# EAGLE board rekick011-panelized (EAGLE 4.16), part 1 of 2
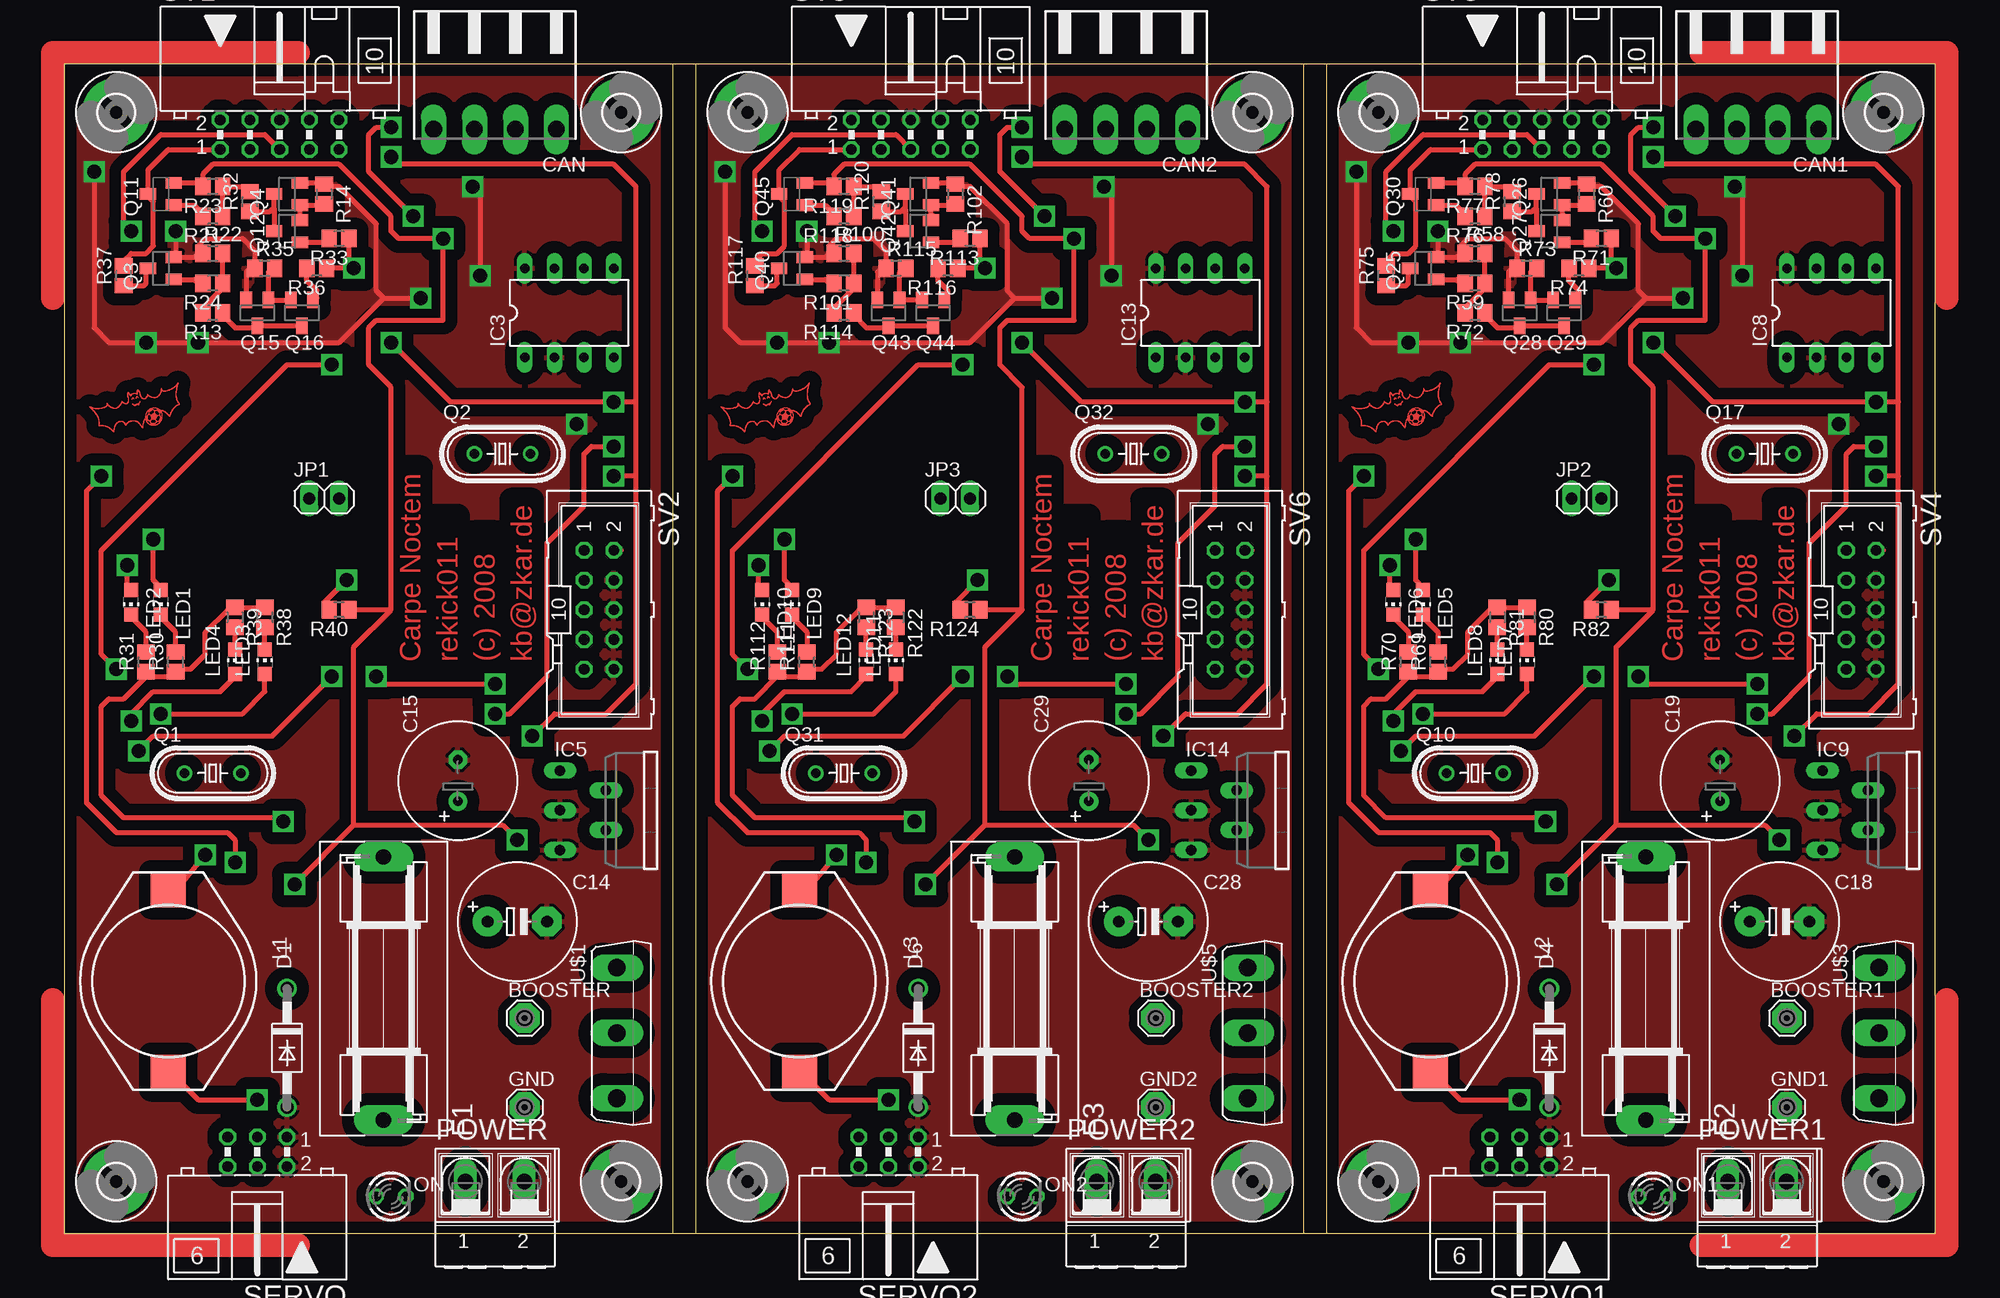
[diagram p0: board, top side]
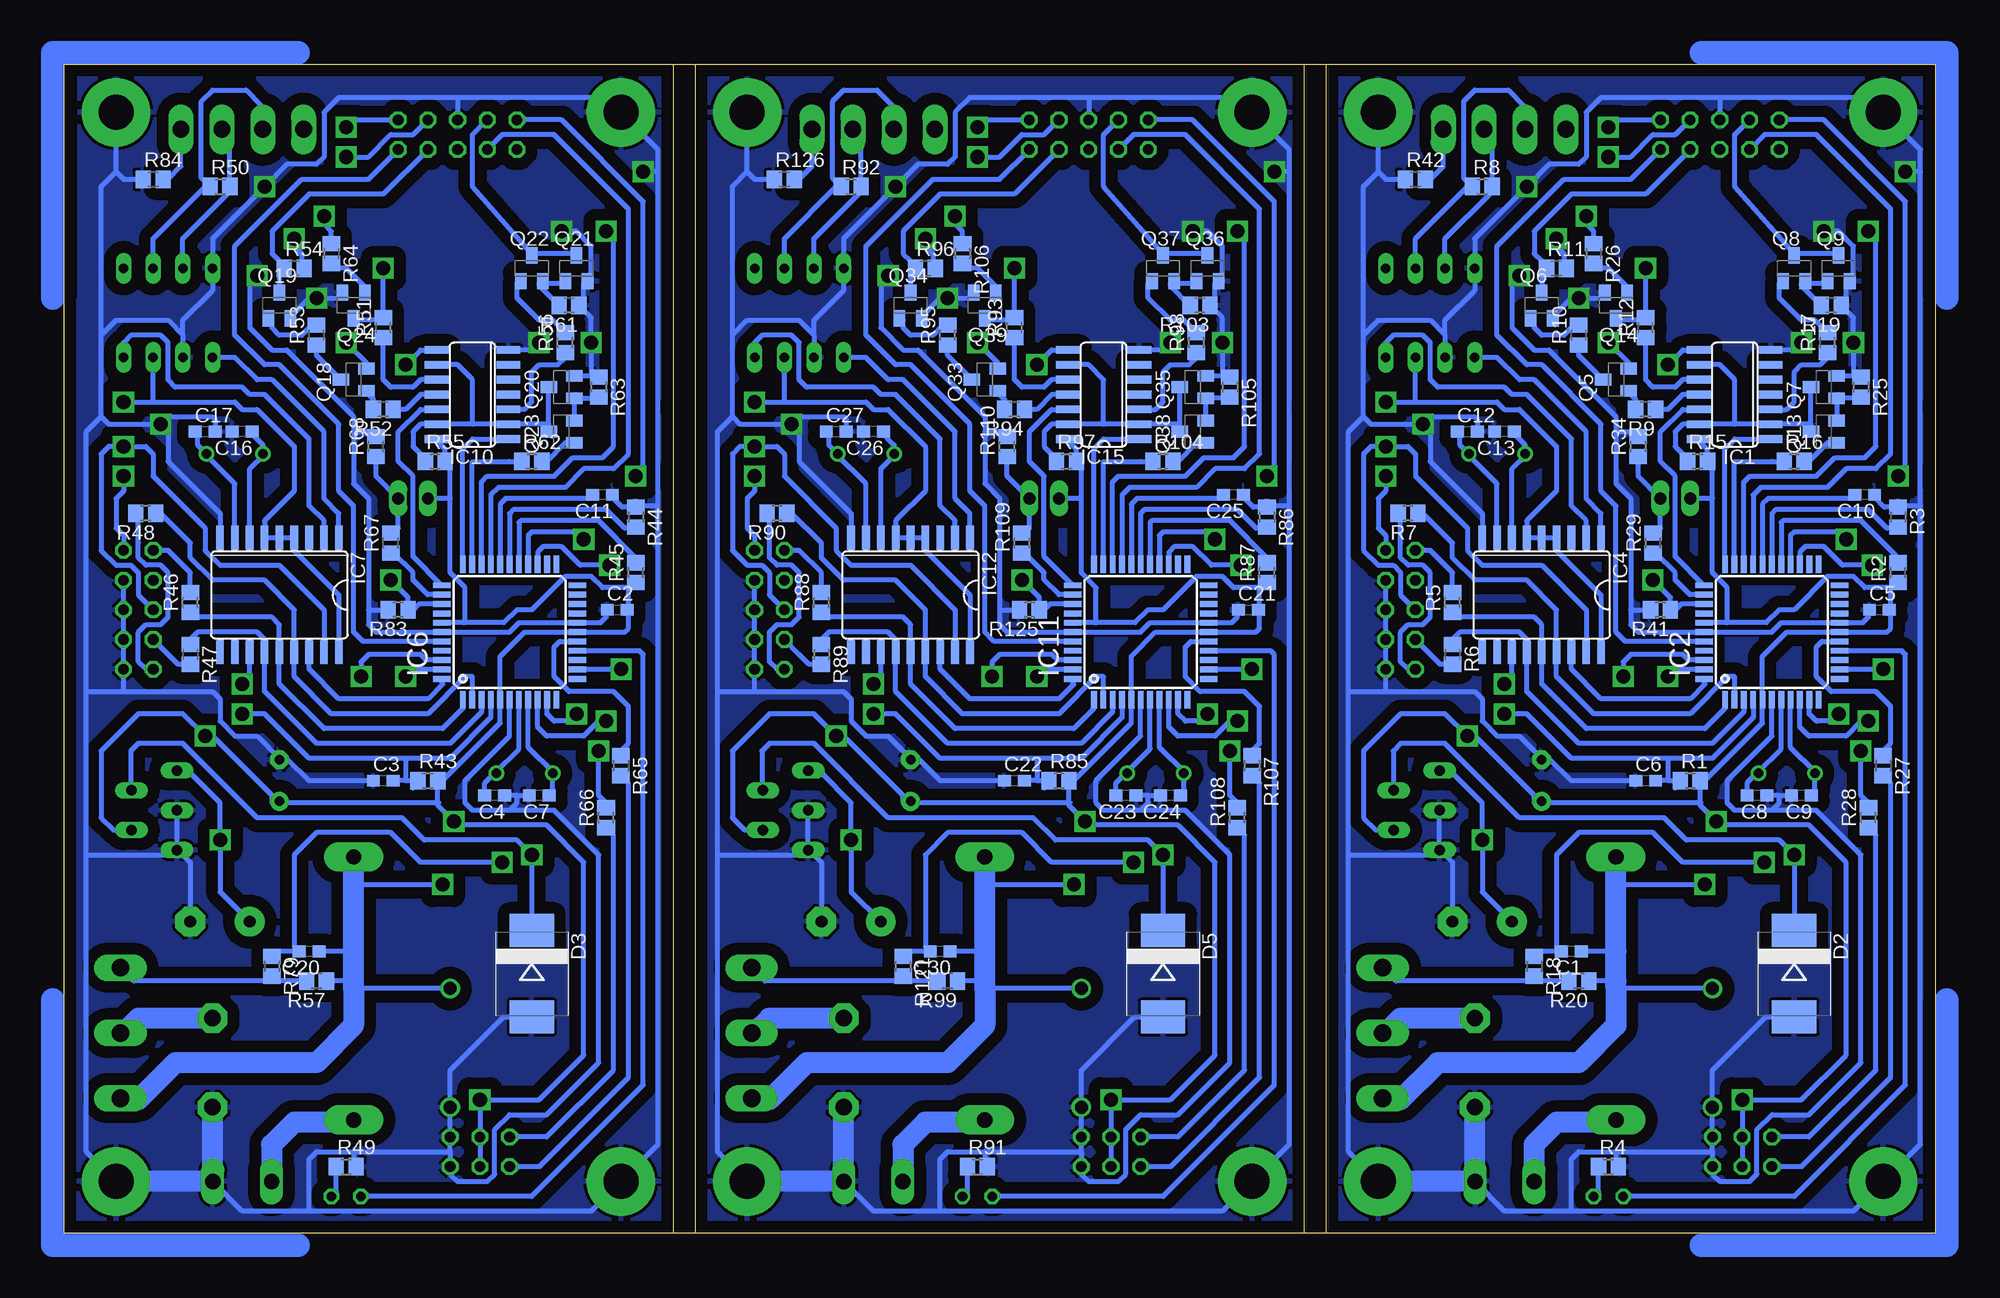
[diagram p1: board, bottom side, seen from below]

Size 160 x 100 mm. Coordinates in mm from the lower left corner, seen from the top.
Outline: 0,0 160,0
Outline: 160,0 160,100
Outline: 160,100 0,100
Outline: 0,100 0,0
Outline: 0,0 52.05,0 52.05,100 0,100
Outline: 0,100 0,0
Outline: 160,0 107.95,0 107.95,100 160,100
Outline: 160,0 160,100
Outline: 53.98,0 106.03,0 106.03,100 53.98,100 53.98,0
Copper layers (1*16): Top 0.035mm / dielectric 1.5mm / Bottom 0.035mm
Design rules "default": minimum track width 10mil, minimum drill 24mil, track to track 8mil, track to pad 8mil, pad to pad 8mil, via to via 8mil, smd to smd 8mil, copper to edge 40mil, drill to drill 8mil, minimum pad ring 10mil, minimum via ring 8mil, stop-mask expansion 4mil, vias tented up to drill 0mil, thermal gap 10mil
Net classes: 1 Power: width 0.406 mm

## Footprints (pad centres in the part's own frame; a part is rotated, then mirrored left to right if it is on the bottom)
SE14 = drill 1.397 pad 2.54 octagon: MP 0,0
C0603 = smd 1.1 x 1: 1 -0.85,0; 2 0.85,0
E5-10,5 = drill 1.016 pad 2.54 round: + -2.54,0 | drill 1.016 pad 2.54 octagon: - 2.54,0
E3,5-10 = drill 0.813 pad 1.6 round: + -1.778,0 | drill 0.813 pad 1.6 octagon: - 1.778,0
90-4 = drill 1.422 long: 1 -5.25,5.25; 2 -1.75,5.25; 3 1.75,5.25; 4 5.25,5.25
DO41-10 = drill 1.118 round: A 5.08,0; C -5.08,0
SMC = smd 2.8 x 3.8: A 3.7,0; C -3.7,0
SH22,5A = drill 1.321 pad 2.54 long: 1 -11.252,0; 2 11.252,0
3,0-PAD = drill 3 pad 5.842 round: B3,0 0,0
SO14 = smd 0.66 x 2.032: 1 -3.81,-3.073; 2 -2.54,-3.073; 3 -1.27,-3.073; 4 0,-3.073; 5 1.27,-3.073; 6 2.54,-3.073; 7 3.81,-3.073; 8 3.81,3.073; 9 2.54,3.073; 10 1.27,3.073; 11 0,3.073; 12 -1.27,3.073; 13 -2.54,3.073; 14 -3.81,3.073
TQFP44 = smd 1.5 x 0.5: 1 -5.8,4; 2 -5.8,3.2; 3 -5.8,2.4; 4 -5.8,1.6; 5 -5.8,0.8; 6 -5.8,0; 7 -5.8,-0.8; 8 -5.8,-1.6; 9 -5.8,-2.4; 10 -5.8,-3.2; 11 -5.8,-4; 23 5.8,-4; 24 5.8,-3.2; 25 5.8,-2.4; 26 5.8,-1.6; 27 5.8,-0.8; 28 5.8,0; 29 5.8,0.8; 30 5.8,1.6; 31 5.8,2.4; 32 5.8,3.2; 33 5.8,4 | smd 0.5 x 1.5: 12 -4,-5.8; 13 -3.2,-5.8; 14 -2.4,-5.8; 15 -1.6,-5.8; 16 -0.8,-5.8; 17 0,-5.8; 18 0.8,-5.8; 19 1.6,-5.8; 20 2.4,-5.8; 21 3.2,-5.8; 22 4,-5.8; 34 4,5.8; 35 3.2,5.8; 36 2.4,5.8; 37 1.6,5.8; 38 0.8,5.8; 39 0,5.8; 40 -0.8,5.8; 41 -1.6,5.8; 42 -2.4,5.8; 43 -3.2,5.8; 44 -4,5.8
DIL08 = drill 0.813 long: 1 -3.81,-3.81; 2 -1.27,-3.81; 3 1.27,-3.81; 4 3.81,-3.81; 5 3.81,3.81; 6 1.27,3.81; 7 -1.27,3.81; 8 -3.81,3.81
SO18L = smd 0.66 x 2.032: 1 -5.08,-4.902; 2 -3.81,-4.902; 3 -2.54,-4.902; 4 -1.27,-4.902; 5 0,-4.902; 6 1.27,-4.902; 7 2.54,-4.902; 8 3.81,-4.902; 9 5.08,-4.902; 10 5.08,4.902; 11 3.81,4.902; 12 2.54,4.902; 13 1.27,4.902; 14 0,4.902; 15 -1.27,4.902; 16 -2.54,4.902; 17 -3.81,4.902; 18 -5.08,4.902
TO220-51 = drill 0.9 long: 1 -3.4,-8.4; 2 -1.7,-4.5; 3 0,-8.4; 4 1.7,-4.5; 5 3.4,-8.4
1X02 = drill 1.016 long: 1 -1.27,0; 2 1.27,0
PISR = smd 3 x 3: P$1 -7.8,0; P$2 7.8,0
CHIP-LED0805 = smd 1.2 x 1.2: A 0,-1.05; C 0,1.05
LED3MM = drill 0.813 octagon: A -1.27,0; K 1.27,0
AK500/2-H = drill 1.321 long: 1 -2.515,0; 2 2.515,0
HC49/S = drill 0.813 round: 1 -2.413,0; 2 2.413,0
HC49U-V = drill 0.813 round: 1 -2.413,0; 2 2.413,0
SOT23 = smd 1 x 1.4: 1 -0.95,-1.1; 2 0.95,-1.1; 3 0,1.1
SOT23-BEC = smd 1 x 1.4: B -0.95,-1.1; C 0,1.1; E 0.95,-1.1
R0805 = smd 1.3 x 1.5: 1 -0.85,0; 2 0.85,0
ML6L = drill 0.914 octagon: 1 -2.54,-1.27; 2 -2.54,1.27; 3 0,-1.27; 4 0,1.27; 5 2.54,-1.27; 6 2.54,1.27
ML10L = drill 0.914 octagon: 1 -5.08,-1.27; 2 -5.08,1.27; 3 -2.54,-1.27; 4 -2.54,1.27; 5 0,-1.27; 6 0,1.27; 7 2.54,-1.27; 8 2.54,1.27; 9 5.08,-1.27; 10 5.08,1.27
ML10 = drill 0.914 octagon: 1 -5.08,-1.27; 2 -5.08,1.27; 3 -2.54,-1.27; 4 -2.54,1.27; 5 0,-1.27; 6 0,1.27; 7 2.54,-1.27; 8 2.54,1.27; 9 5.08,-1.27; 10 5.08,1.27
TO247BV = drill 1.499 long: D 0,-0.381; G -5.588,-0.381; S 5.588,-0.381

## Placement (x,y rotation side)
BOOSTER  SE14  [SE14]  39.37,18.41 0 top
BOOSTER1  SE14  [SE14]  147.32,18.41 0 top
BOOSTER2  SE14  [SE14]  93.34,18.41 0 top
C1  100n  [C0603]  31.11,24.13 180 bottom
C2  100n  [C0603]  112.71,53.34 0 bottom
C3  100n  [C0603]  132.72,38.73 0 bottom
C4  22p  [C0603]  123.19,37.47 180 bottom
C5  100n  [C0603]  4.76,53.34 0 bottom
C6  100n  [C0603]  24.77,38.73 0 bottom
C7  22p  [C0603]  119.38,37.47 180 bottom
C8  22p  [C0603]  15.24,37.47 180 bottom
C9  22p  [C0603]  11.43,37.47 180 bottom
C10  100n  [C0603]  6.03,63.18 180 bottom
C11  100n  [C0603]  113.98,63.18 180 bottom
C12  22p  [C0603]  40.01,68.58 0 bottom
C13  22p  [C0603]  36.83,68.58 180 bottom
C14  220µF/35V  [E5-10,5]  38.73,26.67 0 top
C15  220µF/25V  [E3,5-10]  33.66,38.73 90 top
C16  22p  [C0603]  144.78,68.58 180 bottom
C17  22p  [C0603]  147.96,68.58 0 bottom
C18  220µF/35V  [E5-10,5]  146.69,26.67 0 top
C19  220µF/25V  [E3,5-10]  141.6,38.73 90 top
C20  100n  [C0603]  139.06,24.13 180 bottom
C21  100n  [C0603]  58.74,53.34 0 bottom
C22  100n  [C0603]  78.74,38.73 0 bottom
C23  22p  [C0603]  69.22,37.47 180 bottom
C24  22p  [C0603]  65.41,37.47 180 bottom
C25  100n  [C0603]  60.01,63.18 180 bottom
C26  22p  [C0603]  90.81,68.58 180 bottom
C27  22p  [C0603]  93.98,68.58 0 bottom
C28  220µF/35V  [E5-10,5]  92.71,26.67 0 top
C29  220µF/25V  [E3,5-10]  87.63,38.73 90 top
C30  100n  [C0603]  85.09,24.13 180 bottom
CAN  [90-4]  36.83,99.69 180 top
CAN1  [90-4]  144.78,99.69 180 top
CAN2  [90-4]  90.81,99.69 180 top
D1  1N4001  [DO41-10]  19.05,15.88 270 top
D2  MBRS360  [SMC]  12.06,22.23 270 bottom
D3  MBRS360  [SMC]  120.02,22.23 270 bottom
D4  1N4001  [DO41-10]  127,15.88 270 top
D5  MBRS360  [SMC]  66.04,22.23 270 bottom
D6  1N4001  [DO41-10]  73.03,15.88 270 top
F1  [SH22,5A]  27.3,20.95 90 top
F2  [SH22,5A]  135.25,20.95 90 top
F3  [SH22,5A]  81.28,20.95 90 top
GND  SE14  [SE14]  39.37,10.79 0 top
GND1  SE14  [SE14]  147.32,10.79 0 top
GND2  SE14  [SE14]  93.34,10.79 0 top
H1  MOUNT-PAD-ROUND3.0  [3,0-PAD]  4.45,95.89 0 top
H2  MOUNT-PAD-ROUND3.0  [3,0-PAD]  4.45,4.45 0 top
H3  MOUNT-PAD-ROUND3.0  [3,0-PAD]  47.62,95.89 0 top
H4  MOUNT-PAD-ROUND3.0  [3,0-PAD]  47.62,4.45 0 top
H5  MOUNT-PAD-ROUND3.0  [3,0-PAD]  112.39,95.89 0 top
H6  MOUNT-PAD-ROUND3.0  [3,0-PAD]  112.39,4.45 0 top
H7  MOUNT-PAD-ROUND3.0  [3,0-PAD]  155.57,95.89 0 top
H8  MOUNT-PAD-ROUND3.0  [3,0-PAD]  155.57,4.45 0 top
H9  MOUNT-PAD-ROUND3.0  [3,0-PAD]  58.42,95.89 0 top
H10  MOUNT-PAD-ROUND3.0  [3,0-PAD]  58.42,4.45 0 top
H11  MOUNT-PAD-ROUND3.0  [3,0-PAD]  101.6,95.89 0 top
H12  MOUNT-PAD-ROUND3.0  [3,0-PAD]  101.6,4.45 0 top
IC1  4081D  [SO14]  17.14,71.75 90 bottom
IC2  MEGA32-A  [TQFP44]  13.97,51.44 90 bottom
IC3  PCA82C250  [DIL08]  43.18,78.74 0 top
IC4  MCP2515-E/SO  [SO18L]  33.66,54.61 180 bottom
IC5  LM2576-5V  [TO220-51]  50.8,36.2 270 top
IC6  MEGA32-A  [TQFP44]  121.92,51.44 90 bottom
IC7  MCP2515-E/SO  [SO18L]  141.6,54.61 180 bottom
IC8  PCA82C250  [DIL08]  151.13,78.74 0 top
IC9  LM2576-5V  [TO220-51]  158.75,36.2 270 top
IC10  4081D  [SO14]  125.09,71.75 90 bottom
IC11  MEGA32-A  [TQFP44]  67.94,51.44 90 bottom
IC12  MCP2515-E/SO  [SO18L]  87.63,54.61 180 bottom
IC13  PCA82C250  [DIL08]  97.16,78.74 0 top
IC14  LM2576-5V  [TO220-51]  104.78,36.2 270 top
IC15  4081D  [SO14]  71.12,71.75 90 bottom
JP1  [1X02]  22.23,62.87 0 top
JP2  [1X02]  130.18,62.87 0 top
JP3  [1X02]  76.2,62.87 0 top
L1  [PISR]  8.89,21.59 270 top
L2  [PISR]  116.84,21.59 270 top
L3  [PISR]  62.87,21.59 270 top
LED1  [CHIP-LED0805]  8.26,53.98 180 top
LED2  [CHIP-LED0805]  5.71,53.98 180 top
LED3  [CHIP-LED0805]  17.14,48.9 0 top
LED4  [CHIP-LED0805]  14.61,48.9 0 top
LED5  [CHIP-LED0805]  116.2,53.98 180 top
LED6  [CHIP-LED0805]  113.67,53.98 180 top
LED7  [CHIP-LED0805]  125.09,48.9 0 top
LED8  [CHIP-LED0805]  122.56,48.9 0 top
LED9  [CHIP-LED0805]  62.23,53.98 180 top
LED10  [CHIP-LED0805]  59.69,53.98 180 top
LED11  [CHIP-LED0805]  71.12,48.9 0 top
LED12  [CHIP-LED0805]  68.58,48.9 0 top
ON  green  [LED3MM]  27.94,3.17 0 top
ON1  green  [LED3MM]  135.89,3.17 0 top
ON2  green  [LED3MM]  81.92,3.17 0 top
POWER  [AK500/2-H]  36.83,4.45 0 top
POWER1  [AK500/2-H]  144.78,4.45 0 top
POWER2  [AK500/2-H]  90.81,4.45 0 top
Q1  16MHz  [HC49/S]  12.7,39.37 0 top
Q2  16MHz  [HC49U-V]  37.47,66.67 0 top
Q3  BC847A  [SOT23]  8.26,82.55 90 top
Q4  BC847A  [SOT23]  19.05,88.9 90 top
Q5  BC857  [SOT23-BEC]  27.3,73.03 90 bottom
Q6  BC847  [SOT23-BEC]  33.66,79.38 0 bottom
Q7  BC847  [SOT23-BEC]  9.53,72.39 90 bottom
Q8  BC847  [SOT23-BEC]  12.06,82.55 0 bottom
Q9  BC847  [SOT23-BEC]  8.26,82.55 0 bottom
Q10  16MHz  [HC49/S]  120.65,39.37 0 top
Q11  BC857A  [SOT23-BEC]  8.26,88.9 90 top
Q12  BC847A  [SOT23]  19.05,85.72 90 top
Q13  BC847  [SOT23-BEC]  9.53,68.58 90 bottom
Q14  BC847  [SOT23-BEC]  27.3,79.38 180 bottom
Q15  BC847A  [SOT23]  16.51,78.74 180 top
Q16  BC847A  [SOT23]  20.32,78.74 180 top
Q17  16MHz  [HC49U-V]  145.41,66.67 0 top
Q18  BC857  [SOT23-BEC]  135.25,73.03 90 bottom
Q19  BC847  [SOT23-BEC]  141.6,79.38 0 bottom
Q20  BC847  [SOT23-BEC]  117.47,72.39 90 bottom
Q21  BC847  [SOT23-BEC]  116.2,82.55 0 bottom
Q22  BC847  [SOT23-BEC]  120.02,82.55 0 bottom
Q23  BC847  [SOT23-BEC]  117.47,68.58 90 bottom
Q24  BC847  [SOT23-BEC]  135.25,79.38 180 bottom
Q25  BC847A  [SOT23]  116.2,82.55 90 top
Q26  BC847A  [SOT23]  127,88.9 90 top
Q27  BC847A  [SOT23]  127,85.72 90 top
Q28  BC847A  [SOT23]  124.46,78.74 180 top
Q29  BC847A  [SOT23]  128.27,78.74 180 top
Q30  BC857A  [SOT23-BEC]  116.2,88.9 90 top
Q31  16MHz  [HC49/S]  66.67,39.37 0 top
Q32  16MHz  [HC49U-V]  91.44,66.67 0 top
Q33  BC857  [SOT23-BEC]  81.28,73.03 90 bottom
Q34  BC847  [SOT23-BEC]  87.63,79.38 0 bottom
Q35  BC847  [SOT23-BEC]  63.5,72.39 90 bottom
Q36  BC847  [SOT23-BEC]  62.23,82.55 0 bottom
Q37  BC847  [SOT23-BEC]  66.04,82.55 0 bottom
Q38  BC847  [SOT23-BEC]  63.5,68.58 90 bottom
Q39  BC847  [SOT23-BEC]  81.28,79.38 180 bottom
Q40  BC847A  [SOT23]  62.23,82.55 90 top
Q41  BC847A  [SOT23]  73.03,88.9 90 top
Q42  BC847A  [SOT23]  73.03,85.72 90 top
Q43  BC847A  [SOT23]  70.48,78.74 180 top
Q44  BC847A  [SOT23]  74.3,78.74 180 top
Q45  BC857A  [SOT23-BEC]  62.23,88.9 90 top
R1  10k  [R0805]  20.95,38.73 0 bottom
R2  0  [R0805]  3.17,56.52 90 bottom
R3  0  [R0805]  3.17,61.28 270 bottom
R4  2k7  [R0805]  27.94,5.71 0 bottom
R5  4k7  [R0805]  41.27,53.98 90 bottom
R6  4k7  [R0805]  41.27,49.53 270 bottom
R7  4k7  [R0805]  45.09,61.59 180 bottom
R8  4k7  [R0805]  38.73,89.53 0 bottom
R9  1k  [R0805]  24.77,70.48 180 bottom
R10  4k7  [R0805]  30.48,76.83 90 bottom
R11  10k  [R0805]  32.38,82.55 0 bottom
R12  1k  [R0805]  24.77,77.47 90 bottom
R13  4k7  [R0805]  12.7,78.74 180 top
R14  2k2  [R0805]  22.23,88.9 270 top
R15  10k  [R0805]  20.32,66.04 0 bottom
R16  1k  [R0805]  12.06,66.04 0 bottom
R17  1k  [R0805]  9.21,76.2 90 bottom
R18  100  [R0805]  34.29,22.86 270 bottom
R19  4k7  [R0805]  8.89,79.38 180 bottom
R20  10k  [R0805]  30.48,21.59 180 bottom
R21  4k7  [R0805]  12.7,87 180 top
R22  1k  [R0805]  12.7,83.82 0 top
R23  1k  [R0805]  12.7,89.53 180 top
R24  4k7  [R0805]  12.7,81.28 180 top
R25  10M  [R0805]  6.35,72.39 270 bottom
R26  1k  [R0805]  29.21,83.82 270 bottom
R27  0  [R0805]  4.45,40.01 270 bottom
R28  0  [R0805]  5.71,35.56 90 bottom
R29  100  [R0805]  24.13,59.05 90 bottom
R30  220  [R0805]  9.53,48.9 90 top
R31  220  [R0805]  6.99,48.9 90 top
R32  4k7  [R0805]  15.88,88.27 90 top
R33  100  [R0805]  23.5,85.09 180 top
R34  10k  [R0805]  25.4,67.31 90 bottom
R35  2k2  [R0805]  17.14,82.55 0 top
R36  100  [R0805]  21.59,82.55 180 top
R37  100  [R0805]  5.08,81.92 90 top
R38  220  [R0805]  17.14,52.7 270 top
R39  220  [R0805]  14.61,52.7 270 top
R40  30k  [R0805]  23.5,53.34 180 top
R41  4k7  [R0805]  23.5,53.34 180 bottom
R42  0  [R0805]  44.45,90.17 0 bottom
R43  10k  [R0805]  128.91,38.73 0 bottom
R44  0  [R0805]  111.12,61.28 270 bottom
R45  0  [R0805]  111.12,56.52 90 bottom
R46  4k7  [R0805]  149.22,53.98 90 bottom
R47  4k7  [R0805]  149.22,49.53 270 bottom
R48  4k7  [R0805]  153.03,61.59 180 bottom
R49  2k7  [R0805]  135.89,5.71 0 bottom
R50  4k7  [R0805]  146.69,89.53 0 bottom
R51  1k  [R0805]  132.72,77.47 90 bottom
R52  1k  [R0805]  132.72,70.48 180 bottom
R53  4k7  [R0805]  138.43,76.83 90 bottom
R54  10k  [R0805]  140.34,82.55 0 bottom
R55  10k  [R0805]  128.27,66.04 0 bottom
R56  1k  [R0805]  117.16,76.2 90 bottom
R57  10k  [R0805]  138.43,21.59 180 bottom
R58  1k  [R0805]  120.65,83.82 0 top
R59  4k7  [R0805]  120.65,81.28 180 top
R60  2k2  [R0805]  130.18,88.9 270 top
R61  4k7  [R0805]  116.84,79.38 180 bottom
R62  1k  [R0805]  120.02,66.04 0 bottom
R63  10M  [R0805]  114.3,72.39 270 bottom
R64  1k  [R0805]  137.16,83.82 270 bottom
R65  0  [R0805]  112.39,40.01 270 bottom
R66  0  [R0805]  113.67,35.56 90 bottom
R67  100  [R0805]  132.08,59.05 90 bottom
R68  10k  [R0805]  133.35,67.31 90 bottom
R69  220  [R0805]  117.47,48.9 90 top
R70  220  [R0805]  114.94,48.9 90 top
R71  100  [R0805]  131.44,85.09 180 top
R72  4k7  [R0805]  120.65,78.74 180 top
R73  2k2  [R0805]  125.09,82.55 0 top
R74  100  [R0805]  129.54,82.55 180 top
R75  100  [R0805]  113.03,81.92 90 top
R76  4k7  [R0805]  120.65,87 180 top
R77  1k  [R0805]  120.65,89.53 180 top
R78  4k7  [R0805]  123.83,88.27 90 top
R79  100  [R0805]  142.24,22.86 270 bottom
R80  220  [R0805]  125.09,52.7 270 top
R81  220  [R0805]  122.56,52.7 270 top
R82  30k  [R0805]  131.44,53.34 180 top
R83  4k7  [R0805]  131.44,53.34 180 bottom
R84  0  [R0805]  152.4,90.17 0 bottom
R85  10k  [R0805]  74.93,38.73 0 bottom
R86  0  [R0805]  57.15,61.28 270 bottom
R87  0  [R0805]  57.15,56.52 90 bottom
R88  4k7  [R0805]  95.25,53.98 90 bottom
R89  4k7  [R0805]  95.25,49.53 270 bottom
R90  4k7  [R0805]  99.06,61.59 180 bottom
R91  2k7  [R0805]  81.92,5.71 0 bottom
R92  4k7  [R0805]  92.71,89.53 0 bottom
R93  1k  [R0805]  78.74,77.47 90 bottom
R94  1k  [R0805]  78.74,70.48 180 bottom
R95  4k7  [R0805]  84.45,76.83 90 bottom
R96  10k  [R0805]  86.36,82.55 0 bottom
R97  10k  [R0805]  74.3,66.04 0 bottom
R98  1k  [R0805]  63.18,76.2 90 bottom
R99  10k  [R0805]  84.45,21.59 180 bottom
R100  1k  [R0805]  66.67,83.82 0 top
R101  4k7  [R0805]  66.67,81.28 180 top
R102  2k2  [R0805]  76.2,88.9 270 top
R103  4k7  [R0805]  62.87,79.38 180 bottom
R104  1k  [R0805]  66.04,66.04 0 bottom
R105  10M  [R0805]  60.33,72.39 270 bottom
R106  1k  [R0805]  83.19,83.82 270 bottom
R107  0  [R0805]  58.42,40.01 270 bottom
R108  0  [R0805]  59.69,35.56 90 bottom
R109  100  [R0805]  78.11,59.05 90 bottom
R110  10k  [R0805]  79.38,67.31 90 bottom
R111  220  [R0805]  63.5,48.9 90 top
R112  220  [R0805]  60.96,48.9 90 top
R113  100  [R0805]  77.47,85.09 180 top
R114  4k7  [R0805]  66.67,78.74 180 top
R115  2k2  [R0805]  71.12,82.55 0 top
R116  100  [R0805]  75.56,82.55 180 top
R117  100  [R0805]  59.05,81.92 90 top
R118  4k7  [R0805]  66.67,87 180 top
R119  1k  [R0805]  66.67,89.53 180 top
R120  4k7  [R0805]  69.85,88.27 90 top
R121  100  [R0805]  88.27,22.86 270 bottom
R122  220  [R0805]  71.12,52.7 270 top
R123  220  [R0805]  68.58,52.7 270 top
R124  30k  [R0805]  77.47,53.34 180 top
R125  4k7  [R0805]  77.47,53.34 180 bottom
R126  0  [R0805]  98.42,90.17 0 bottom
SERVO  [ML6L]  16.51,6.99 180 top
SERVO1  [ML6L]  124.46,6.99 180 top
SERVO2  [ML6L]  70.48,6.99 180 top
SV1  [ML10L]  18.41,93.98 0 top
SV2  [ML10]  45.72,53.34 270 top
SV3  [ML10L]  126.36,93.98 0 top
SV4  [ML10]  153.67,53.34 270 top
SV5  [ML10L]  72.39,93.98 0 top
SV6  [ML10]  99.69,53.34 270 top
U$1  FQA12P20  [TO247BV]  47.62,17.14 270 top
U$2  [CN-LOGO-WIRE]  6.35,70.48 0 top
U$3  FQA12P20  [TO247BV]  155.57,17.14 270 top
U$4  [CN-LOGO-WIRE]  114.3,70.48 0 top
U$5  FQA12P20  [TO247BV]  101.6,17.14 270 top
U$6  [CN-LOGO-WIRE]  60.33,70.48 0 top

## Library data of the parts
BOOSTER BOOSTER1 BOOSTER2 GND GND1 GND2 = solpad
C1-C30 R1-R126 = rcl
CAN CAN1 CAN2 = con-weidmueller-sl35
D1-D6 = diode
F1-F3 = fuse
H1-H12 = holes
IC1 IC10 IC15 = 40xx
IC2 IC6 IC11 = atmel
IC3 IC8 IC13 = micro-philips
IC4 IC7 IC12 = mcp2515
IC5 IC9 IC14 = linear
JP1-JP3 = pinhead
L1-L3 = L-PISR
LED1-LED12 ON ON1 ON2 = led
POWER POWER1 POWER2 = con-ptr500
Q1 Q2 Q10 Q17 Q31 Q32 = crystal
Q3 Q4 Q6-Q9 Q12-Q16 Q19-Q29 Q34-Q44 = transistor-npn
Q5 Q11 Q18 Q30 Q33 Q45 = transistor-pnp
SERVO SERVO1 SERVO2 SV1-SV6 = con-harting-ml
U$1-U$6 = carpenoctem

## Nets
+5V [Power]: C5.2 C15.+ IC1.14 IC2.5 IC2.17 IC2.38 IC3.3 IC4.4 IC4.5 IC4.6 IC4.18 IC5.4 JP1.1 L1.P$2 Q5.E R1.2 R2.1 R15.2 R30.1 R31.1 R38.1 R39.1 SERVO.3 SERVO.4 SV1.8 SV2.2
+5V1 [Power]: C2.2 C19.+ IC6.5 IC6.17 IC6.38 IC7.4 IC7.5 IC7.6 IC7.18 IC8.3 IC9.4 IC10.14 JP2.1 L2.P$2 Q18.E R43.2 R45.1 R55.2 R69.1 R70.1 R80.1 R81.1 SERVO1.3 SERVO1.4 SV3.8 SV4.2
+5V2 [Power]: C21.2 C29.+ IC11.5 IC11.17 IC11.38 IC12.4 IC12.5 IC12.6 IC12.18 IC13.3 IC14.4 IC15.14 JP3.1 L3.P$2 Q33.E R85.2 R87.1 R97.2 R111.1 R112.1 R122.1 R123.1 SERVO2.3 SERVO2.4 SV5.8 SV6.2
+24V [Power]: C1.1 C14.+ D1.C F1.2 IC5.1 Q11.E R11.2 R20.1 R23.2 R40.1 U$1.S
+24V1 [Power]: C18.+ C20.1 D4.C F2.2 IC9.1 Q30.E R54.2 R57.1 R77.2 R82.1 U$3.S
+24V2 [Power]: C28.+ C30.1 D6.C F3.2 IC14.1 Q45.E R96.2 R99.1 R119.2 R124.1 U$5.S
ADC_BOOST: IC2.30 SV1.3
ADC_BOOST1: IC6.30 SV3.3
ADC_BOOST2: IC11.30 SV5.3
ADC_NORM: IC2.31 SV1.5
ADC_NORM1: IC6.31 SV3.5
ADC_NORM2: IC11.31 SV5.5
ADC_SUPPLY: IC2.36 R40.2 R41.1
ADC_SUPPLY1: IC6.36 R82.2 R83.1
ADC_SUPPLY2: IC11.36 R124.2 R125.1
CS: IC2.44 IC4.16
CS1: IC6.44 IC7.16
CS2: IC11.44 IC12.16
GND [Power]: C5.1 C6.1 C8.1 C9.2 C10.1 C12.2 C13.2 C14.- C15.- D1.A D2.A GND.MP H1.B3,0 H2.B3,0 H3.B3,0 H4.B3,0 IC1.7 IC2.6 IC2.18 IC2.39 IC3.2 IC3.8 IC4.9 IC5.3 IC5.5 POWER.2 Q3.2 Q4.2 Q6.E Q7.E Q9.E Q14.E Q15.2 R3.1 R4.2 R14.1 R19.1 R22.1 R25.1 R34.2 R35.1 R41.2 R42.1 SERVO.1 SERVO.2 SV1.6 SV2.4 SV2.6 SV2.8 SV2.10
GND1 [Power]: C2.1 C3.1 C4.1 C7.2 C11.1 C16.2 C17.2 C18.- C19.- D3.A D4.A GND1.MP H5.B3,0 H6.B3,0 H7.B3,0 H8.B3,0 IC6.6 IC6.18 IC6.39 IC7.9 IC8.2 IC8.8 IC9.3 IC9.5 IC10.7 POWER1.2 Q19.E Q20.E Q21.E Q24.E Q25.2 Q26.2 Q28.2 R44.1 R49.2 R58.1 R60.1 R61.1 R63.1 R68.2 R73.1 R83.2 R84.1 SERVO1.1 SERVO1.2 SV3.6 SV4.4 SV4.6 SV4.8 SV4.10
GND2 [Power]: C21.1 C22.1 C23.1 C24.2 C25.1 C26.2 C27.2 C28.- C29.- D5.A D6.A GND2.MP H9.B3,0 H10.B3,0 H11.B3,0 H12.B3,0 IC11.6 IC11.18 IC11.39 IC12.9 IC13.2 IC13.8 IC14.3 IC14.5 IC15.7 POWER2.2 Q34.E Q35.E Q36.E Q39.E Q40.2 Q41.2 Q43.2 R86.1 R91.2 R100.1 R102.1 R103.1 R105.1 R110.2 R115.1 R125.2 R126.1 SERVO2.1 SERVO2.2 SV5.6 SV6.4 SV6.6 SV6.8 SV6.10
MISO: IC2.2 IC4.15 R7.1
MISO1: IC6.2 IC7.15 R48.1
MISO2: IC11.2 IC12.15 R90.1
MOSI: IC2.1 IC4.14 R5.1
MOSI1: IC6.1 IC7.14 R46.1
MOSI2: IC11.1 IC12.14 R88.1
N$1: IC2.15 ON.A
N$2: C10.2 IC2.29
N$3: IC2.27 R2.2
N$4: C9.1 IC2.8 Q1.1
N$5: C8.2 IC2.7 Q1.2
N$6: R5.2 SV2.1
N$7: IC2.28 R3.2
N$8: R6.2 SV2.7
N$9: R7.2 SV2.9
N$10 [Power]: Q8.C Q9.C SV1.4
N$11: R13.2 R22.2 R24.1
N$12: IC3.1 IC4.1
N$13: Q8.E Q9.B R19.2
N$14: Q4.1 Q12.2 R14.2
N$15: Q14.C R12.2 R33.1 R36.1
N$16: Q12.1 R33.2
N$17: Q3.1 R24.2
N$18: Q11.B R21.2
N$19: Q11.C R37.2 SV1.1
N$20: C1.2 R18.1 SV1.2
N$21: Q8.B R17.2
N$22: IC3.4 IC4.2
N$23: Q7.B Q13.E R25.2
N$24: CAN.3 IC3.6 R8.1
N$25: Q13.B R16.2
N$26: R18.2 R20.2 U$1.G
N$27: Q14.B R26.2
N$28: Q6.B R10.2
N$29: Q6.C R11.1 SV1.7
N$30 [Power]: D2.C IC5.2 L1.P$1
N$31: ON.K R4.1
N$32: Q5.C R10.1
N$33: Q5.B R9.2
N$34: R26.1 SV1.10
N$35: IC1.11 R9.1
N$36: IC1.10 R12.1
N$37: R27.2 SERVO.6
N$38: R28.1 SERVO.5
N$39: C7.1 IC6.8 Q10.1
N$40: IC1.3 R17.1
N$41: BOOSTER.MP U$1.D
N$42: IC2.42 IC4.12
N$43 [Power]: F1.1 POWER.1
N$44: LED2.C R31.2
N$45: LED1.C R30.2
N$46: CAN.1 R42.2
N$47: JP1.2 R29.2 R34.1
N$48: IC2.26 LED1.A
N$49: IC2.25 LED2.A
N$50: R21.1 R23.1 R32.2
N$51: Q4.3 Q12.3 R32.1
N$52: Q15.1 Q16.2 R35.2
N$53: C13.1 IC4.7 Q2.1
N$54: C12.1 IC4.8 Q2.2
N$55: Q15.3 Q16.3 R13.1
N$56: Q16.1 R36.2
N$57: Q3.3 R37.1
N$58: LED3.C R38.2
N$59: CAN.2 IC3.7 R8.2
N$60: LED4.C R39.2
N$61: IC2.10 LED3.A
N$62: IC2.9 LED4.A
N$63: C4.2 IC6.7 Q10.2
N$64: R46.2 SV4.1
N$65: R47.2 SV4.7
N$66: R48.2 SV4.9
N$67: ON1.K R49.1
N$68: IC6.15 ON1.A
N$69: C11.2 IC6.29
N$70: IC6.27 R45.2
N$71: IC6.28 R44.2
N$72: IC7.1 IC8.1
N$73: C16.1 IC7.7 Q17.1
N$74: C17.1 IC7.8 Q17.2
N$75: CAN1.3 IC8.6 R50.1
N$76: CAN1.2 IC8.7 R50.2
N$77: IC7.2 IC8.4
N$78 [Power]: D3.C IC9.2 L2.P$1
N$79: Q19.B R53.2
N$80: Q19.C R54.1 SV3.7
N$81: Q18.C R53.1
N$82: Q18.B R52.2
N$83: BOOSTER1.MP U$3.D
N$84 [Power]: F2.1 POWER1.1
N$85: R57.2 R79.2 U$3.G
N$86: IC10.10 R51.1
N$87: IC10.11 R52.1
N$88: IC10.3 R56.1
N$89: IC6.42 IC7.12
N$90: Q26.1 Q27.2 R60.2
N$91: Q24.C R51.2 R71.1 R74.1
N$92 [Power]: Q21.C Q22.C SV3.4
N$93: Q21.B Q22.E R61.2
N$94: Q22.B R56.2
N$95: Q20.B Q23.E R63.2
N$96: Q23.B R62.2
N$97: Q24.B R64.2
N$98: R64.1 SV3.10
N$99: R65.2 SERVO1.6
N$100: R66.1 SERVO1.5
N$101: JP2.2 R67.2 R68.1
N$102: LED6.C R70.2
N$103: LED5.C R69.2
N$104: IC6.26 LED5.A
N$105: IC6.25 LED6.A
N$106: Q26.3 Q27.3 R78.1
N$107: Q27.1 R71.2
N$108: Q25.1 R59.2
N$109: Q28.1 Q29.2 R73.2
N$110: Q28.3 Q29.3 R72.1
N$111: Q29.1 R74.2
N$112: Q25.3 R75.1
N$113: Q30.C R75.2 SV3.1
N$114: R58.2 R59.1 R72.2
N$115: Q30.B R76.2
N$116: R76.1 R77.1 R78.2
N$117: C20.2 R79.1 SV3.2
N$118: LED7.C R80.2
N$119: LED8.C R81.2
N$120: IC6.10 LED7.A
N$121: IC6.9 LED8.A
N$122: CAN1.1 R84.2
N$123: C24.1 IC11.8 Q31.1
N$124: C23.2 IC11.7 Q31.2
N$125: R88.2 SV6.1
N$126: R89.2 SV6.7
N$127: R90.2 SV6.9
N$128: ON2.K R91.1
N$129: IC11.15 ON2.A
N$130: C25.2 IC11.29
N$131: IC11.27 R87.2
N$132: IC11.28 R86.2
N$133: IC12.1 IC13.1
N$134: C26.1 IC12.7 Q32.1
N$135: C27.1 IC12.8 Q32.2
N$136: CAN2.3 IC13.6 R92.1
N$137: CAN2.2 IC13.7 R92.2
N$138: IC12.2 IC13.4
N$139 [Power]: D5.C IC14.2 L3.P$1
N$140: Q34.B R95.2
N$141: Q34.C R96.1 SV5.7
N$142: Q33.C R95.1
N$143: Q33.B R94.2
N$144: BOOSTER2.MP U$5.D
N$145 [Power]: F3.1 POWER2.1
N$146: R99.2 R121.2 U$5.G
N$147: IC15.10 R93.1
N$148: IC15.11 R94.1
N$149: IC15.3 R98.1
N$150: IC11.42 IC12.12
N$151: Q41.1 Q42.2 R102.2
N$152: Q39.C R93.2 R113.1 R116.1
N$153 [Power]: Q36.C Q37.C SV5.4
N$154: Q36.B Q37.E R103.2
N$155: Q37.B R98.2
N$156: Q35.B Q38.E R105.2
N$157: Q38.B R104.2
N$158: Q39.B R106.2
N$159: R106.1 SV5.10
N$160: R107.2 SERVO2.6
N$161: R108.1 SERVO2.5
N$162: JP3.2 R109.2 R110.1
N$163: LED10.C R112.2
N$164: LED9.C R111.2
N$165: IC11.26 LED9.A
N$166: IC11.25 LED10.A
N$167: Q41.3 Q42.3 R120.1
N$168: Q42.1 R113.2
N$169: Q40.1 R101.2
N$170: Q43.1 Q44.2 R115.2
N$171: Q43.3 Q44.3 R114.1
N$172: Q44.1 R116.2
N$173: Q40.3 R117.1
N$174: Q45.C R117.2 SV5.1
N$175: R100.2 R101.1 R114.2
N$176: Q45.B R118.2
N$177: R118.1 R119.1 R120.2
N$178: C30.2 R121.1 SV5.2
N$179: LED11.C R122.2
N$180: LED12.C R123.2
N$181: IC11.10 LED11.A
N$182: IC11.9 LED12.A
N$183: CAN2.1 R126.2
NORM_OP: IC1.2 IC1.9 IC1.13 Q7.C Q13.C R15.1
NORM_OP1: IC10.2 IC10.9 IC10.13 Q20.C Q23.C R55.1
NORM_OP2: IC15.2 IC15.9 IC15.13 Q35.C Q38.C R97.1
NOT_NORM_OP: IC2.32 R16.1
NOT_NORM_OP1: IC6.32 R62.1
NOT_NORM_OP2: IC11.32 R104.1
ON_HOLD: IC2.40 SV1.9
ON_HOLD1: IC6.40 SV3.9
ON_HOLD2: IC11.40 SV5.9
POW_ON: IC1.1 IC2.33
POW_ON1: IC6.33 IC10.1
POW_ON2: IC11.33 IC15.1
PWM_BOOST: IC1.8 IC2.13
PWM_BOOST1: IC6.13 IC10.8
PWM_BOOST2: IC11.13 IC15.8
PWM_SERVO1: IC2.16 R27.1
PWM_SERVO2: IC2.43 R28.2
PWM_SERVO3: IC6.16 R65.1
PWM_SERVO4: IC6.43 R66.2
PWM_SERVO5: IC11.16 R107.1
PWM_SERVO6: IC11.43 R108.2
RELEASE: IC1.12 IC2.34
RELEASE1: IC6.34 IC10.12
RELEASE2: IC11.34 IC15.12
RST: C6.2 IC2.4 IC4.17 R1.1 SV2.5
RST1: C3.2 IC6.4 IC7.17 R43.1 SV4.5
RST2: C22.2 IC11.4 IC12.17 R85.1 SV6.5
SCK: IC2.3 IC4.13 R6.1
SCK1: IC6.3 IC7.13 R47.1
SCK2: IC11.3 IC12.13 R89.1
SWITCH: IC2.35 R29.1
SWITCH1: IC6.35 R67.1
SWITCH2: IC11.35 R109.1